# EAGLE board Main_schematic (EAGLE 8.1.0)
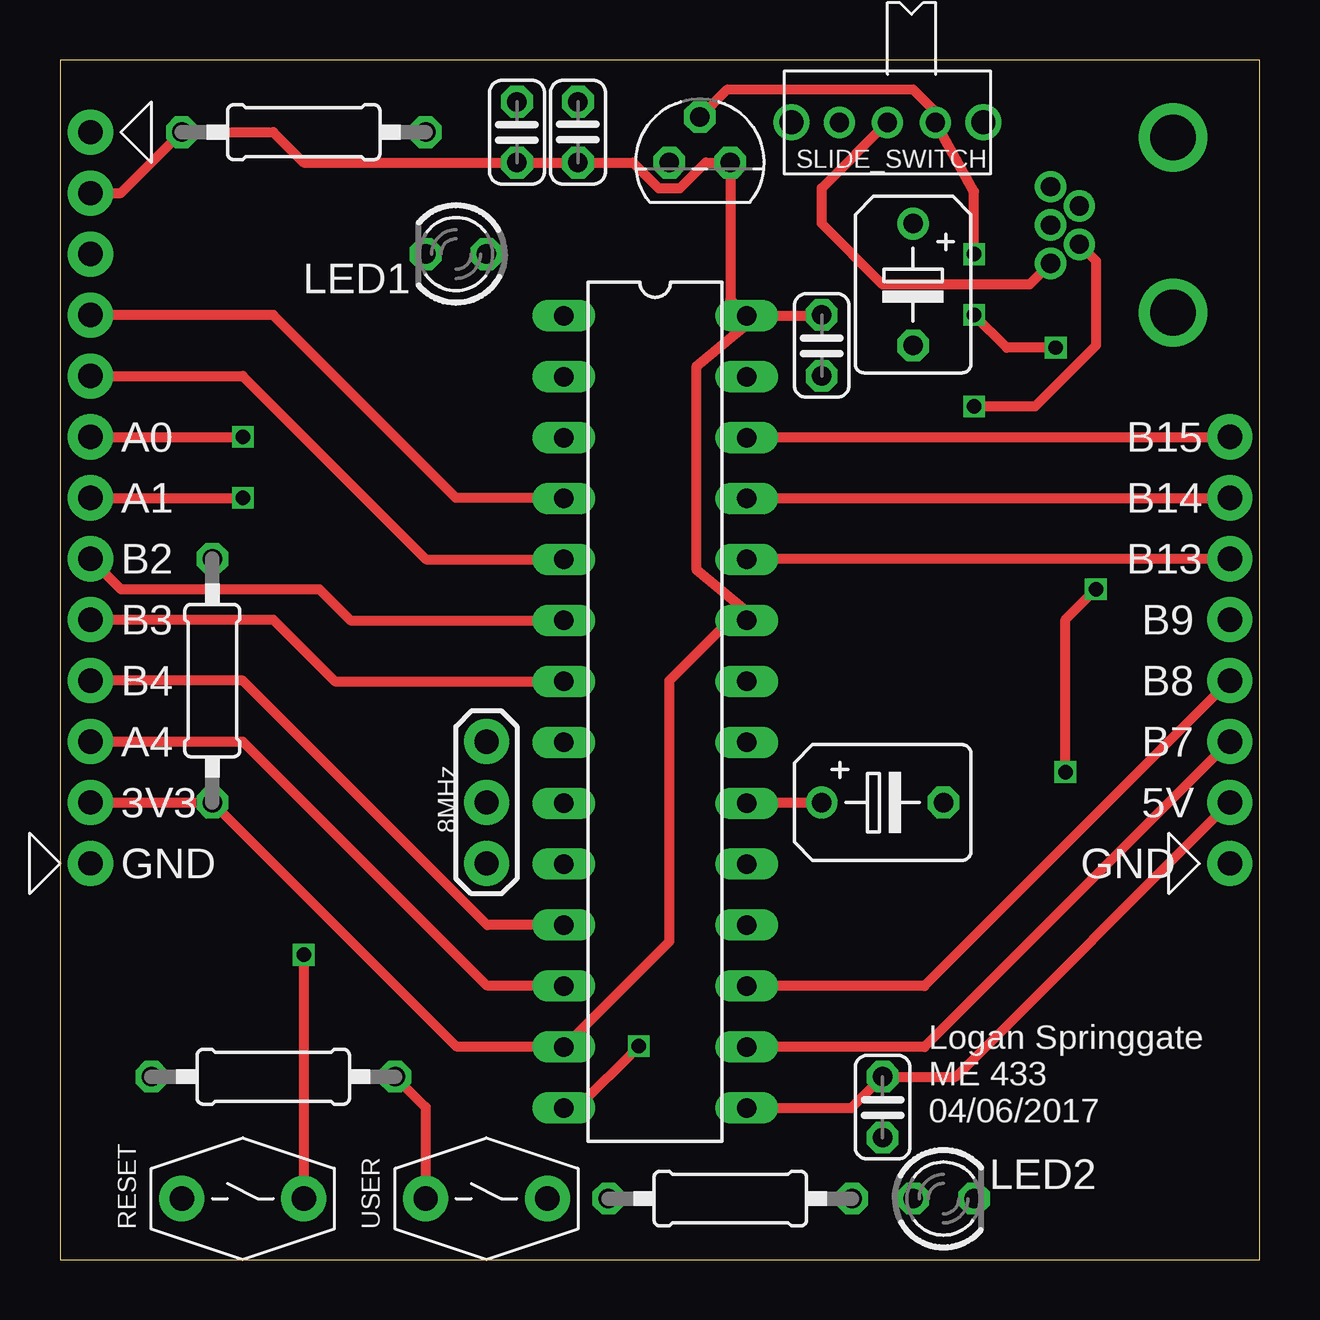
[diagram p0: board, top side]
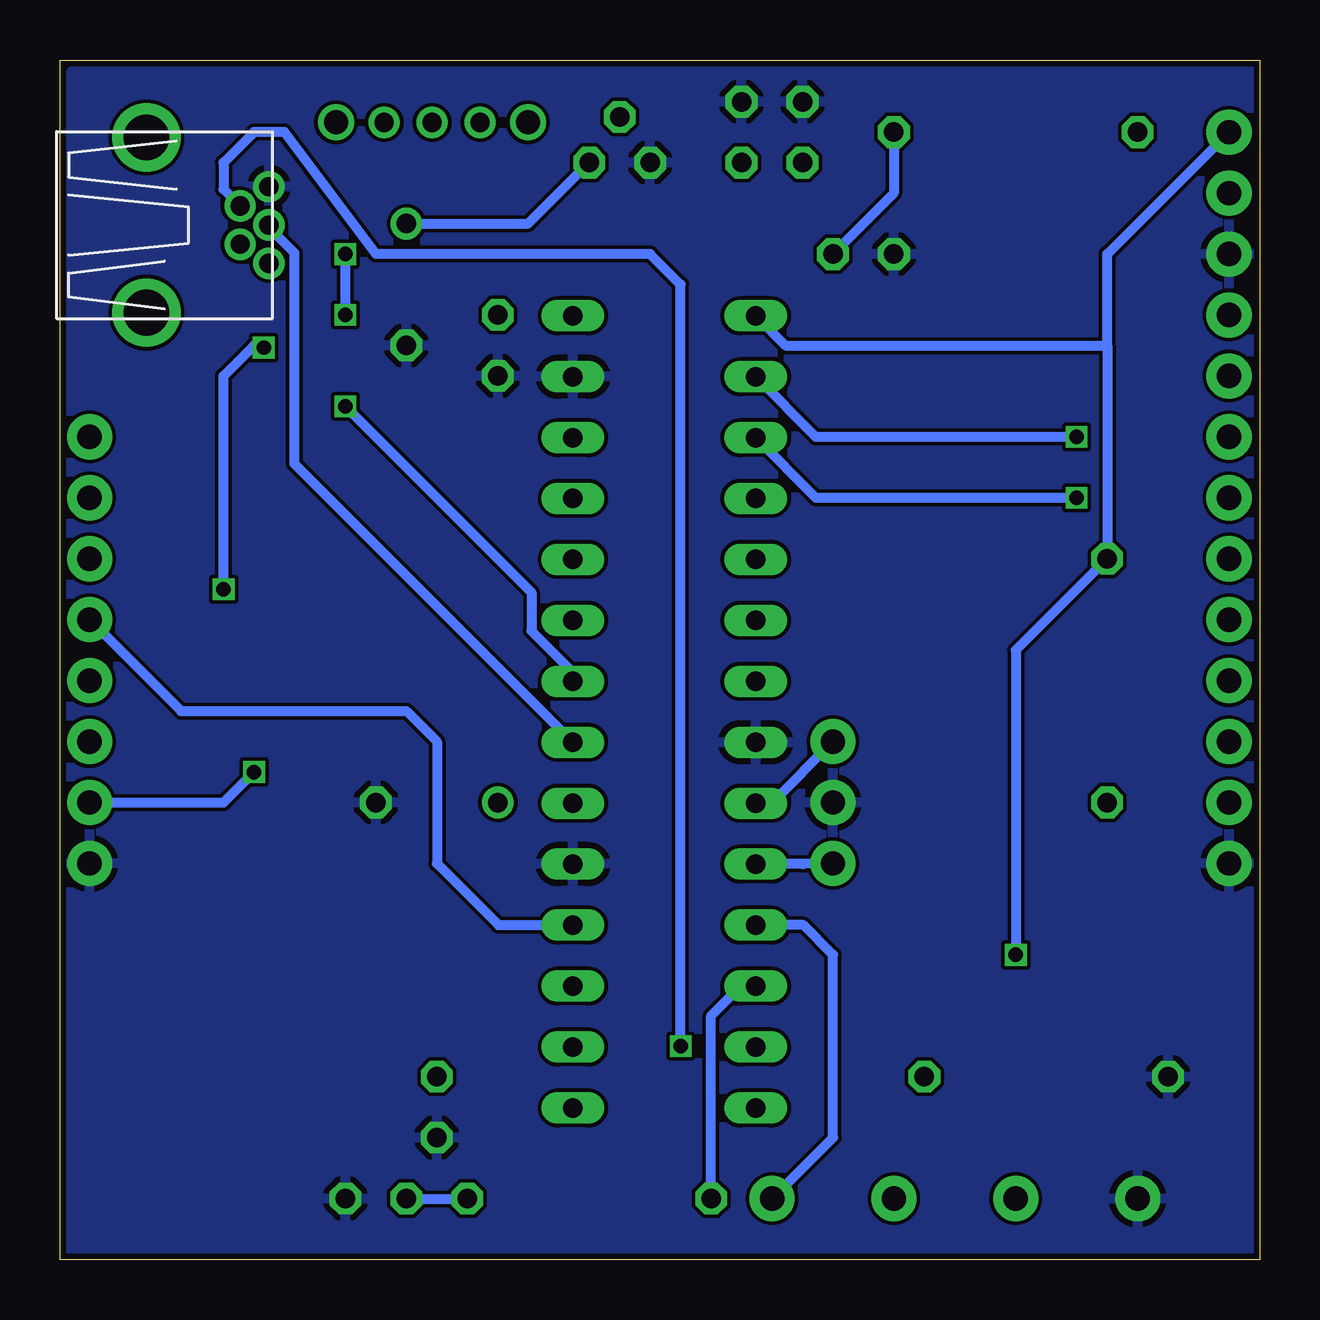
[diagram p1: board, bottom side, seen from below]

Size 50 x 50 mm. Coordinates in mm from the lower left corner, seen from the top.
Outline: 0,0 50,0 50,50 0,50 0,0
Copper layers (1*16): Top 0.035mm / dielectric 1.5mm / Bottom 0.035mm
Design rules "SeeedStudio_2layer_DRU_no_angle_20140221": minimum track width 6mil, minimum drill 12mil, track to track 6mil, track to pad 6mil, pad to pad 6mil, via to via 6mil, smd to smd 0mil, copper to edge 10mil, drill to drill 10mil, minimum pad ring 10mil, minimum via ring 6mil, stop-mask expansion 2mil, vias tented up to drill 100mil, thermal gap 10mil

## Footprints (pad centres in the part's own frame; a part is rotated, then mirrored left to right if it is on the bottom)
B45181B = drill 0.813: + -2.54,0 | drill 0.813 octagon: - 2.54,0
C025-024X044 = drill 0.813 octagon: 1 -1.27,0; 2 1.27,0
USB-MB-H = drill 0.8: D+ 5.1,0; D- 3.9,0.8; GND 5.1,-1.6; ID 3.9,-0.8; VBUS 5.1,1.6 | drill 1.9: P$6 0,-3.65; P$7 0,3.65
1X08 = drill 1.016 pad 1.88: 1 0,0; 2 2.54,0; 3 5.08,0; 4 7.62,0; 5 10.16,0; 6 12.7,0; 7 15.24,0; 8 17.78,0
1X05 = drill 1.016 pad 1.88: 1 0,0; 2 2.54,0; 3 5.08,0; 4 7.62,0; 5 10.16,0
LED3MM = drill 0.813 octagon: A -1.27,0; K 1.27,0
0207/10 = drill 0.813 octagon: 1 -5.08,0; 2 5.08,0
DIL28-3 = drill 0.813 long: 1 -16.51,-3.81; 2 -13.97,-3.81; 3 -11.43,-3.81; 4 -8.89,-3.81; 5 -6.35,-3.81; 6 -3.81,-3.81; 7 -1.27,-3.81; 8 1.27,-3.81; 9 3.81,-3.81; 10 6.35,-3.81; 11 8.89,-3.81; 12 11.43,-3.81; 13 13.97,-3.81; 14 16.51,-3.81; 15 16.51,3.81; 16 13.97,3.81; 17 11.43,3.81; 18 8.89,3.81; 19 6.35,3.81; 20 3.81,3.81; 21 1.27,3.81; 22 -1.27,3.81; 23 -3.81,3.81; 24 -6.35,3.81; 25 -8.89,3.81; 26 -11.43,3.81; 27 -13.97,3.81; 28 -16.51,3.81
TO92 = drill 0.813 octagon: 1 -1.27,0; 2 0,1.905; 3 1.27,0
SLIDE_SWITCH = drill 0.8: 1 -2,0; 2 0,0; 3 2,0 | drill 1: P$1 -4,0; P$2 4,0
PB = drill 1.016 pad 1.88: 1 -2.54,0; 2 2.54,0
OSC = drill 1.016 pad 1.88: 1 -2.54,0; 2 0,0; 3 2.54,0

## Placement (x,y rotation side)
C1  10uF  [B45181B]  35.56,40.64 270 top
C2  10uF  [B45181B]  34.29,19.05 0 top
C7  0.1uF  [C025-024X044]  34.29,6.35 270 top
C8  0.1uF  [C025-024X044]  21.59,46.99 90 top
C9  0.1uF  [C025-024X044]  31.75,38.1 270 top
C10  0.1uF  [C025-024X044]  19.05,46.99 270 top
J1  USB-MB-H  [USB-MB-H]  46.39,43.12 180 top
J2  [1X08]  48.77,16.51 90 top
J3  [1X08]  1.27,16.51 90 top
J4  [1X05]  1.27,46.99 270 top
LED1  Red  [LED3MM]  16.51,41.91 180 top
LED2  Green  [LED3MM]  36.83,2.54 0 top
R1  10k  [0207/10]  6.35,24.13 270 top
R2  330  [0207/10]  10.16,46.99 180 top
R3  10k  [0207/10]  8.89,7.62 0 top
R4  330  [0207/10]  27.94,2.54 180 top
U$1  PIC32MX250F128B  [DIL28-3]  24.81,22.83 270 top
U$2  MCP1702  [TO92]  26.67,45.72 0 top
U$3  SLIDE_SWITCH  [SLIDE_SWITCH]  34.49,47.4 0 top
U$4  PB  [PB]  7.62,2.54 0 top
U$5  PB  [PB]  17.78,2.54 0 top
U$6  OSC  [OSC]  17.78,19.05 270 top

## Library data of the parts
C1 C2 C7-C10 J1 J4 U$1-U$6 = ME433parts
J2 J3 = ME433parts; PROD_ID: CONN-08438
LED1 LED2 = led
R1-R4 = resistor

## Nets
+3V3: C1.+ C8.1 C9.1 C10.2 J3.2 J4.2 R1.2 R2.2 U$1.13 U$1.23 U$1.28 U$2.3
+5V: C7.1 J2.2 U$1.15 U$2.2 U$3.3
A0: J3.8 U$1.2
A1: J3.7 U$1.3
A4: J3.3 R4.2 U$1.12
B2: J3.6 U$1.6
B3: J3.5 U$1.7
B4: J3.4 U$1.11 U$5.2
B7: J2.3 U$1.16
B8: J2.4 U$1.17
B9: J2.5 U$1.18
B13: J2.6 U$1.24
B14: J2.7 U$1.25
B15: J2.8 U$1.26
D+: J1.D+ U$1.21
D-: J1.D- U$1.22
GND: C1.- C2.- C7.2 C8.2 C9.2 C10.1 J1.GND J2.1 J3.1 J4.3 LED1.K LED2.K R3.1 U$1.8 U$1.19 U$1.27 U$2.1 U$4.1 U$6.2
MCLR: J4.1 R1.1 U$1.1 U$4.2
N$1: R3.2 U$5.1
N$2: C2.+ U$1.20
N$3: LED2.A R4.1
N$4: LED1.A R2.1
N$7: J1.VBUS U$3.2
OSC1: U$1.9 U$6.1
OSC2: U$1.10 U$6.3
PGC1: J4.5 U$1.5
PGD1: J4.4 U$1.4
USBID: J1.ID U$1.14

## Tracks (layer width: path | path; a pad name or v marks a point on that pad's centre or on a via)
+3V3
  Top 0.406: U$1.28 27.94,40.02 U$2.3 26.91,45.72 25.84,44.65 24.96,44.65 23.89,45.72 C8.1 C10.2 10.16,45.72 8.89,46.99 R2.2 2.54,44.45 J4.2 | U$1.28 31.75,39.34 C9.1 | U$1.28 28.62,38.97 26.54,37.24 26.54,28.74 28.62,27.01 U$1.23 27.91,26.64 25.4,24.13 25.4,13.26 U$1.13 20.97,8.89 16.51,8.89 R1.2 J3.2
  Bottom 0.406: C1.+ 30.48,43.18 U$2.3
+5V  (via drill 0.6)
  Top 0.406: U$2.2 27.83,48.78 35.56,48.78 36.49,47.85 U$3.3 38.1,44.52 v38.1,41.91 | U$1.15 32.99,6.32 C7.1 37.34,7.62 J2.2 | v41.91,20.32 41.91,26.67 v43.18,27.94 | v41.51,38.01 39.46,38.01 v38.1,39.37
  Bottom 0.406: J2.2 43.18,19.05 v41.91,20.32 | v43.18,27.94 43.18,36.83 41.91,38.1 41.6,38.1 v41.51,38.01 | v38.1,39.37 v38.1,41.91
A0  (via drill 0.6)
  Top 0.406: J3.8 v7.62,34.29
  Bottom 0.406: v7.62,34.29 18.49,34.29 U$1.2
A1  (via drill 0.6)
  Top 0.406: J3.7 v7.62,31.75
  Bottom 0.406: v7.62,31.75 18.49,31.75 U$1.3
A4
  Top 0.406: J3.3 7.62,21.59 17.78,11.43 20.97,11.43 U$1.12
  Bottom 0.406: R4.2 22.86,10.16 21.62,11.4 U$1.12
B2
  Top 0.406: J3.6 2.54,27.94 10.81,27.94 12.11,26.64 U$1.6
B3
  Top 0.406: J3.5 8.89,26.67 11.46,24.1 U$1.7
B4
  Top 0.406: U$1.11 17.81,13.94 7.62,24.13 J3.4
  Bottom 0.406: U$5.2 17.78,5.08 17.78,12.7 19.02,13.94 U$1.11
B7
  Top 0.406: J2.3 36.04,8.86 U$1.16
B8
  Top 0.406: J2.4 36.04,11.4 U$1.17
B9
  Bottom 0.406: J2.5 44.96,22.86 35.56,22.86 34.29,21.59 34.29,16.51 31.72,13.94 U$1.18
B13
  Top 0.406: U$1.24 28.65,29.21 J2.6
B14
  Top 0.406: J2.7 48.74,31.72 U$1.25
B15
  Top 0.406: U$1.26 28.65,34.29 J2.8
D+
  Bottom 0.406: J1.D+ 41.29,43.02 40.23,41.96 40.23,33.17 U$1.21
D-  (via drill 0.6)
  Top 0.406: J1.D- 43.18,41.63 43.18,38.1 40.64,35.56 v38.1,35.56
  Bottom 0.406: v38.1,35.56 30.35,27.81 30.35,26.2 28.62,24.47 U$1.22
GND
  pour Bottom: 0,0 49.53,0 49.53,49.53 0,49.53
MCLR  (via drill 0.6)
  Top 0.406: v10.16,12.7 U$4.2
  Bottom 0.406: J4.1 6.35,41.91 6.35,38.1 | 6.35,38.1 R1.1 10.16,25.4 v10.16,12.7 | U$1.1 19.76,38.1 6.35,38.1
N$1
  Top 0.406: R3.2 15.24,6.35 U$5.1
N$2
  Top 0.406: U$1.20 28.65,19.05 C2.+
N$3
  Bottom 0.406: LED2.A R4.1
N$4
  Bottom 0.406: R2.1 15.24,44.45 LED1.A
N$7
  Top 0.406: U$3.2 31.75,44.66 31.75,43.18 34.29,40.64 40.41,40.64 J1.VBUS
OSC1
  Bottom 0.406: U$6.1 20.35,19.02 U$1.9
OSC2
  Bottom 0.406: U$6.3 19.02,16.48 U$1.10
PGC1
  Top 0.406: J4.5 7.62,36.83 15.27,29.18 U$1.5
PGD1
  Top 0.406: U$1.4 20.97,31.75 16.51,31.75 8.89,39.37 J4.4
USBID  (via drill 0.6)
  Top 0.406: U$1.14 21.56,6.32 v24.13,8.89
  Bottom 0.406: v24.13,8.89 24.13,40.64 25.4,41.91 36.83,41.91 40.64,46.99 41.91,46.99 43.18,45.72 43.18,44.61 J1.ID

## Text on the board
tPlace: A0 | B15 | A1 | B14 | B2 | B13 | B3 | B9 | B4 | B8 | A4 | B7 | 3V3 | 8MHz | 5V | GND | GND | Logan Springgate / ME 433 / 04/06/2017 | RESET | USER